# Altium PCB PCB Rev. 4.PcbDoc
Units mm, origin at the board's own origin, x right, y up, seen from the top; angles counter-clockwise.
Board outline 59 x 80 mm, 2 copper layers (Top Layer, Bottom Layer); 42 components, 70 nets, 272 pads, 157 vias.
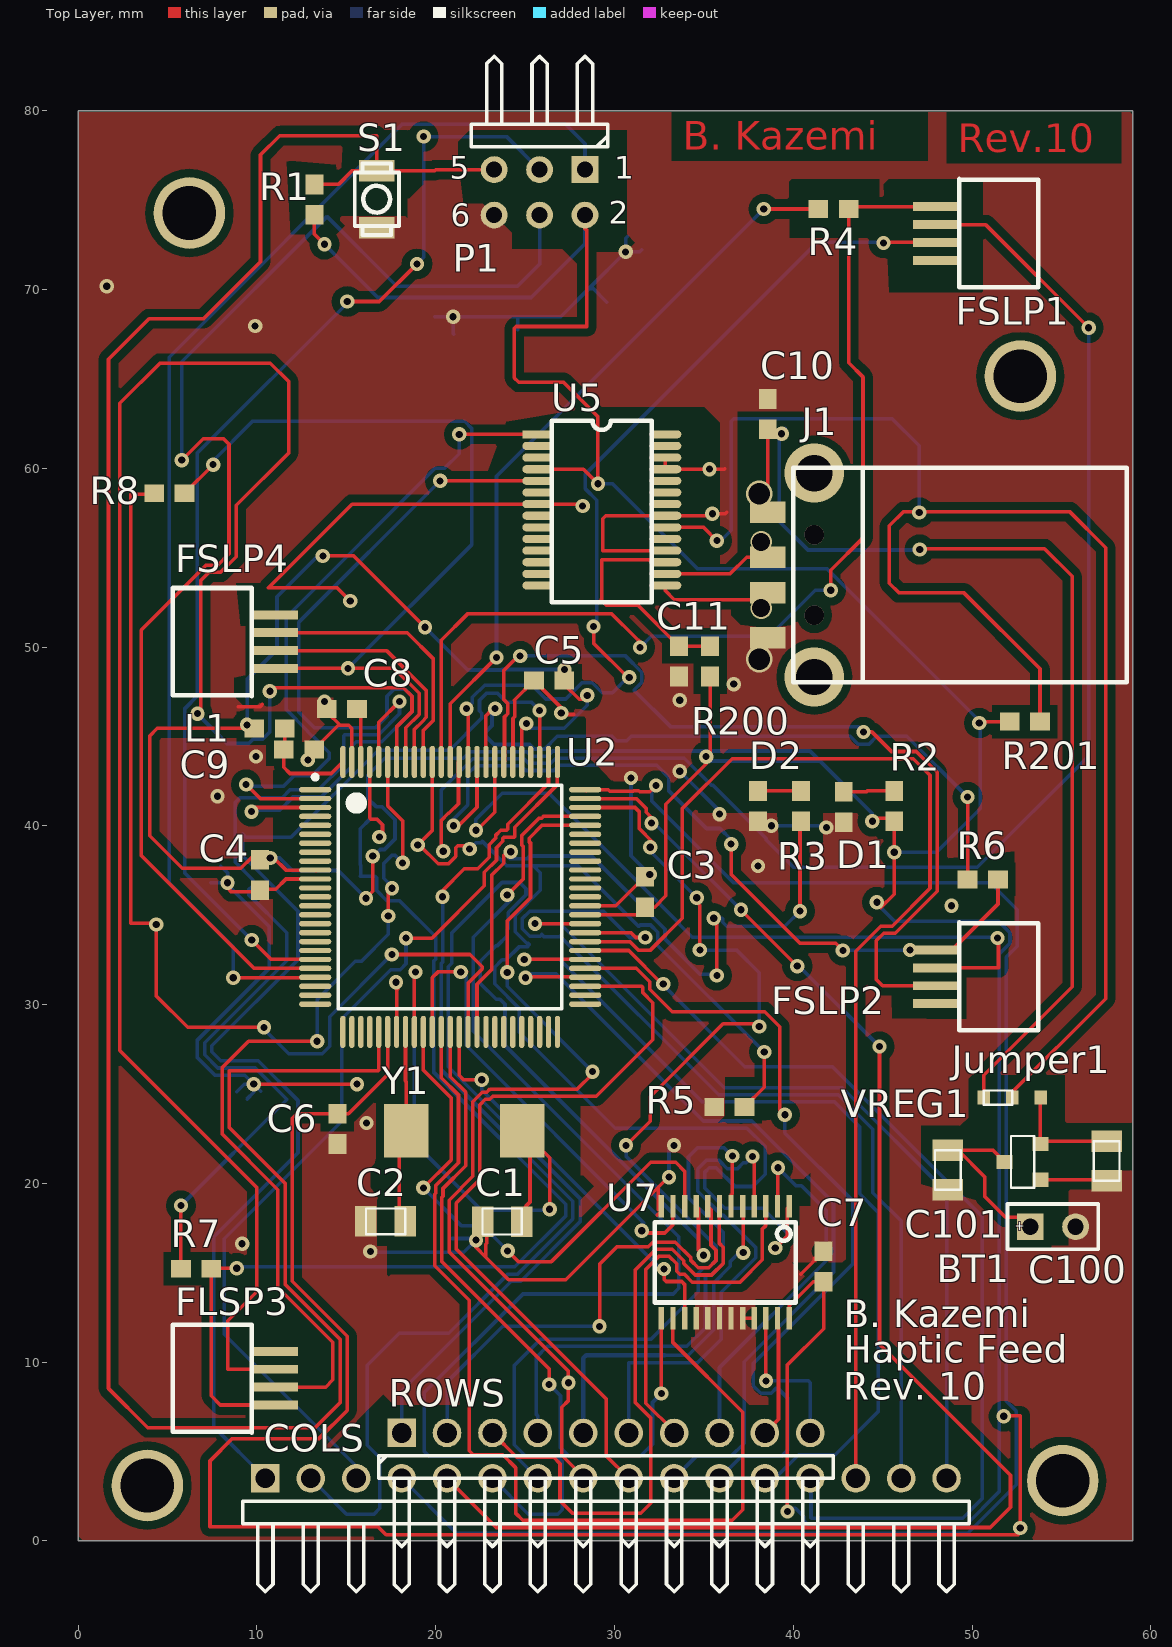
[diagram p0: Top Layer view]
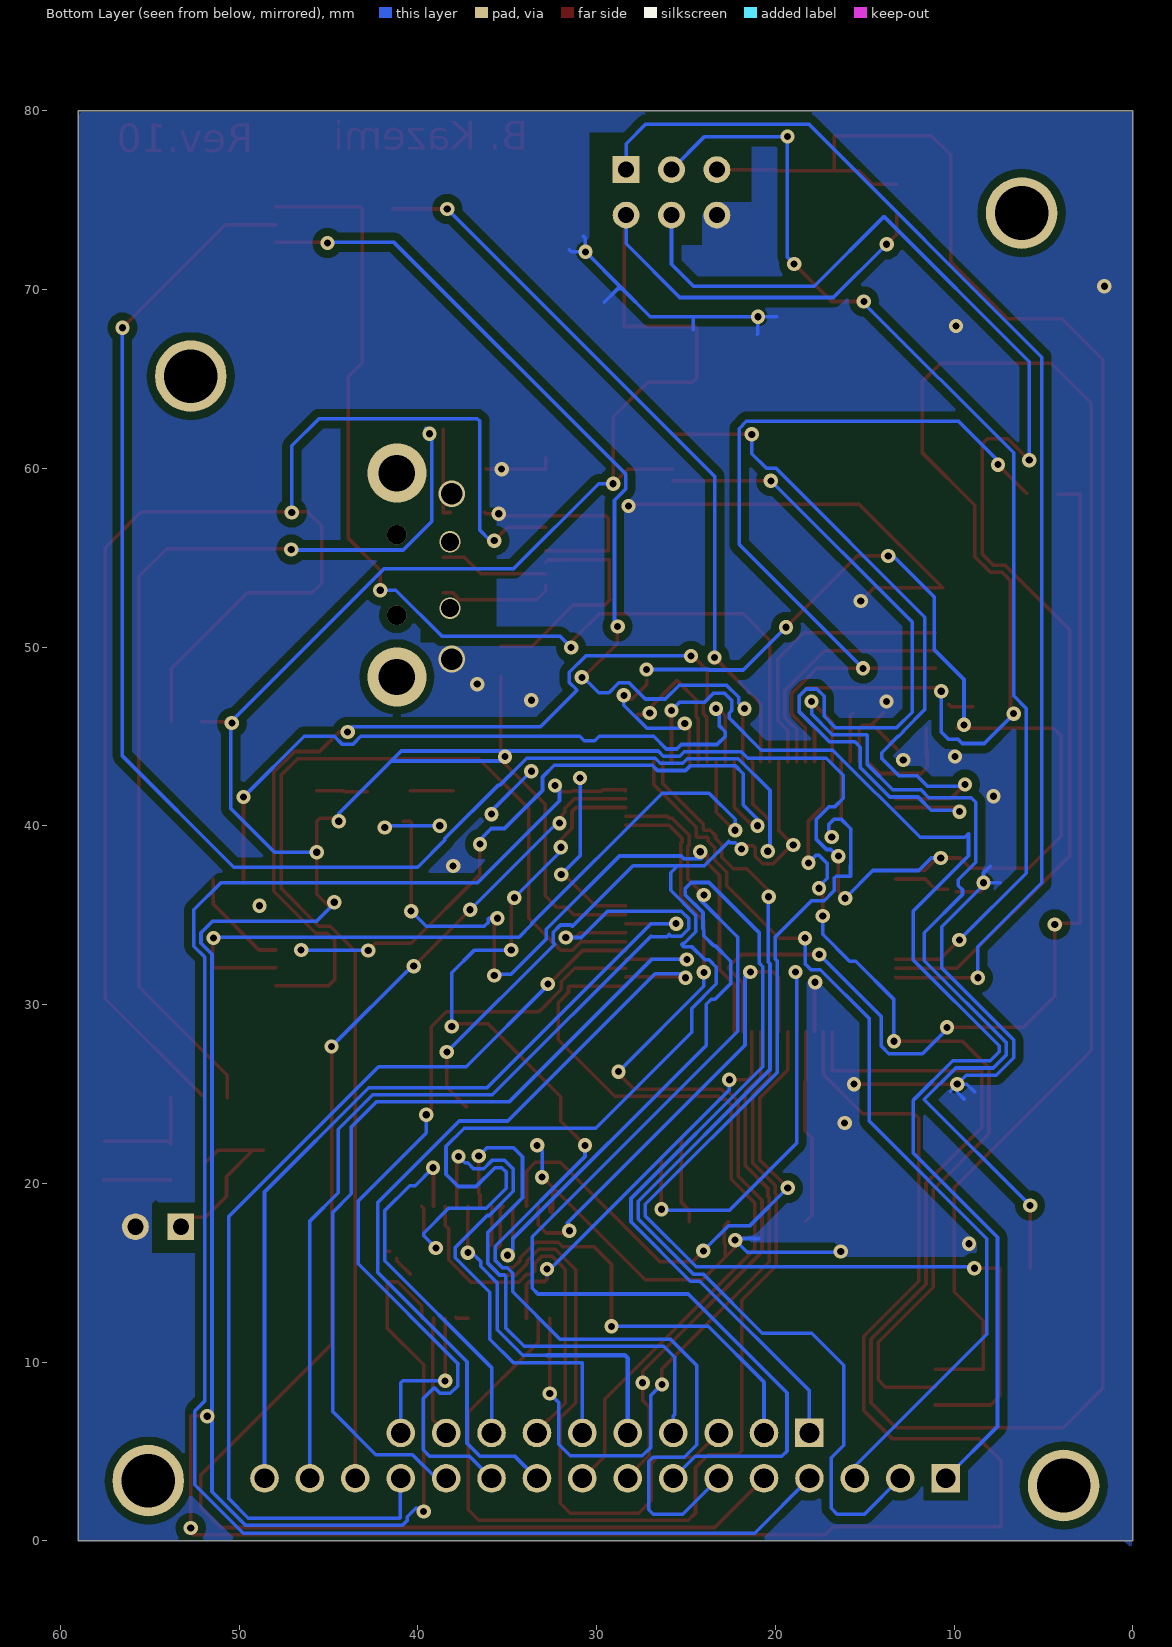
[diagram p1: Bottom Layer view, seen from below]

## Layer stack, top to bottom
Top Solder: solder mask 0.0102, Solder Resist, Dk 3.5
Top Layer: signal copper 0.0356
Dielectric1: core 0.32, FR-4, Dk 4.8
Bottom Layer: signal copper 0.0356
Bottom Solder: solder mask 0.0102, Solder Resist, Dk 3.5

## Board outline
0,80 59,80 59,0 0,0

## Design rules (kind name [scope] priority, off if disabled: settings)
Clearance Clearance_Pour [inPoly] p1: gap=0.45
Clearance [All] p2: gap=0.2
ComponentClearance [All] p1 off: gap=0.2 collisioncheckmode=3 verticalgap=0.2 showdistances=FALSE
FabricationTestPointUsage TestPointUsage [All] p1: valid=0 allowmultiple=FALSE
FabricationTestpoint Testpoint [All] p1: side=3 testpointundercomponent=TRUE minsize=1.016 maxsize=2.54 preferedsize=1.524 minholesize=0 maxholesize=1.016 preferedholesize=0.813 testpointgrid=0.025 allowsidetop=TRUE allowsidebottom=TRUE usegrid=TRUE gridtolerance=0
HoleSize [All] p1: absolutevalues=TRUE maxlimit=4 minlimit=0.2 maxpercent=80.000 minpercent=20.000
MinimumSolderMaskSliver [All] p1 off: minsoldermaskwidth=0.254
PasteMaskExpansion [All] p1 off: expansion=0
PlaneClearance [All] p1: clearance=2
PlaneConnect [All] p1: planeconnectstyle=Direct reliefexpansion=0.8 reliefentries=2 reliefconductorwidth=0.4 reliefairgap=0.4
PolygonConnect [All] p1: connectstyle=Direct reliefconductorwidth=1 reliefentries=4 polygonreliefangle="90 Angle" airgapwidth=0.254
RoutingVias [All] p1: holewidth=0.4 width=0.8 viastyle="Through Hole" minholewidth=0.4 minwidth=0.8 maxholewidth=4 maxwidth=4
SilkToSilkClearance [All] p1 off: silktosilkclearance=0.254
SilkToSolderMaskClearance SilkscreenOverComponentPads [IsPad] p1 off: minsilkscreentomaskgap=0.254 clearancetoexposedcopper=TRUE
SolderMaskExpansion [All] p1 off: expansion=0.102
UnpouredPolygon [All] p1: allowunpoured=FALSE
Width [All] p1: maxlimit=2.6 minlimit=0.2 preferedwidth=0.2 minimp=50.000000 maximp=50.000000 favimp=50.000000
19 further rules are at their usual default settings.

## Components (designator, comment, footprint, x,y, rotation, side; value= is the part's Value field where it differs from the comment)
BT1 "Battery 3.7V Li-Ion" BAT-2 54.525,17.575 r0 top
C1 "12 pF" 0805 23.72,17.863 r180 top
C2 "12 pF" 0805 17.2,17.875 r180 top
C3 "100 nF" 1608[0603] 31.7,36.3 r90 top
C4 "100 nF" 1608[0603] 10.175,37.25 r270 top
C5 "100 nF" 1608[0603] 26.35,48.125 r180 top
C6 "100 nF" 1608[0603] 14.5,23.05 r270 top
C7 "100 nF" 1608[0603] 41.7,15.35 r90 top
C8 "100 nF" 1608[0603] 14.75,46.525 r0 top
C9 "100 nF" 1608[0603] 12.35,44.275 r180 top
C10 "4.7 uF" 1608[0603] 38.575,63.025 r90 top
C11 "100 nF" 1608[0603] 33.6,49.2 r90 top
C100 "1 uF" 0805 57.525,21.25 r90 top
C101 "1 uF" 0805 48.65,20.75 r90 top
COLS "XYZ Pad Columns" "16 PIN HEAD" 10.475,3.5 r0 top (schematic designator COLS1)
D1 "Power LED" 1608[0603] 42.825,41.05 r270 top
D2 "Debug LED" 1608[0603] 38.025,41.1 r270 top
FLSP3 "FSLP" "FSLP SMT connector" 8.204,10.604 r270 top
FSLP1 "FSLP" "FSLP SMT connector" 50.796,71.628 r90 top
FSLP2 "FSLP" "FSLP SMT connector" 50.796,30.054 r90 top
FSLP4 "FSLP" "FSLP SMT connector" 8.204,51.8 r270 top
J1 "USB_CONN_A" USB_CONN_TYPEA_.9 43.875,54.025 r90 top
Jumper1 "0-Ohm Jumper 0603" 0603-Jumper 52.25,24.8 r90 top
L1 "10 uH" 1608[0603] 10.7,45.45 r180 top
P1 "ICSP" HDR2X3H 28.35,76.7 r180 top
R1 "10K" 1608[0603] 13.218,75.023 r270 top
R2 "750" 1608[0603] 45.65,41.1 r90 top
R3 "750" 1608[0603] 40.425,41.1 r90 top
R4 "4.64K" 1608[0603] 42.25,74.5 r0 top
R5 "20K" 1608[0603] 36.425,24.275 r0 top
R6 "4.64K" 1608[0603] 50.6,37 r0 top
R7 "4.64K" 1608[0603] 6.6,15.225 r0 top
R8 "4.64K" 1608[0603] 5.1,58.6 r0 top
R200 "'Bat Jump" J1-0603 35.35,49.2 r90 top
R201 "Bat Jump" J1-0603 52.95,45.825 r180 top
ROWS "XYZ Pad Rows" "10 PIN HEAD" 18.095,6.04 r0 top (schematic designator ROWS1)
S1 "Reset" B3U-1000P 16.697,75.048 r90 top
U2 "ATmega640" 100A_N 20.811,36.024 r0 top
U5 "FT232R" SSOP28 25.738,61.894 r0 top
U7 "74HC4067" 74HC4067 39.771,18.46 r180 top
VREG1 "mcp1700" SOT-23 52.825,21.2 r90 top
Y1 "XTAL" CRYSTAL 18.35,22.95 r0 top

## Footprints (in the part's own frame and the unit in brackets; to place one, negate y for a bottom-side part, rotate by r counter-clockwise, add the part's x,y. Pads: shape width x height; smd on the part's side, far side on the other; paste and mask are expansions set on the pad)
"10 PIN HEAD" [mm] "Connector; Header; 10 Position; Right Angle"
  rect 1.6x1.6 hole 1.1: 1(0,0)
  round 1.6 hole 1.1: 2(2.54,0) 3(5.08,0) 4(7.62,0) 5(10.16,0) 6(12.7,0) 7(15.24,0) 8(17.78,0) 9(20.32,0) 10(22.86,0)
  silkscreen extent -1.27,-6.35 24.13,-1.27
"16 PIN HEAD" [mm] "Connector; Header; 16 Position; Right Angle"
  rect 1.6x1.6 hole 1.1: 1(0,0)
  round 1.6 hole 1.1: 2(2.54,0) 3(5.08,0) 4(7.62,0) 5(10.16,0) 6(12.7,0) 7(15.24,0) 8(17.78,0) 9(20.32,0) 10(22.86,0) 11(25.4,0) 12(27.94,0) 13(30.48,0) 14(33.02,0) 15(35.56,0) 16(38.1,0)
  silkscreen extent -1.27,-6.35 39.37,-1.27
74HC4067 [mm]
  rect 0.3x1.25 smd: 1(0,-0.25) 2(0.65,-0.25) 3(1.3,-0.25) 4(1.95,-0.25) 5(2.6,-0.25) 6(3.25,-0.25) 7(3.9,-0.25) 8(4.55,-0.25) 9(5.2,-0.25) 10(5.85,-0.25) 11(6.5,-0.25) 12(7.15,-0.25) 13(7.15,6) 14(6.5,6) 15(5.85,6) 16(5.2,6) 17(4.55,6) 18(3.9,6) 19(3.25,6) 20(2.6,6) 21(1.95,6) 22(1.3,6) 23(0.65,6) 24(0,6)
  silkscreen extent -0.38,0.62 7.52,5.13
100A_N [mm] "Thin QFP, 100-Leads, Body 14x14mm, Pitch 0.5mm, IPC Medium Density"
  oval 1.8x0.3 smd: 1(-7.55,6) 2(-7.55,5.5) 3(-7.55,5) 4(-7.55,4.5) 5(-7.55,4) 6(-7.55,3.5) 7(-7.55,3) 8(-7.55,2.5) 9(-7.55,2) 10(-7.55,1.5) 11(-7.55,1) 12(-7.55,0.5) 13(-7.55,0) 14(-7.55,-0.5) 15(-7.55,-1) 16(-7.55,-1.5) 17(-7.55,-2) 18(-7.55,-2.5) 19(-7.55,-3) 20(-7.55,-3.5) 21(-7.55,-4) 22(-7.55,-4.5) 23(-7.55,-5) 24(-7.55,-5.5) 25(-7.55,-6) 51(7.55,-6) 52(7.55,-5.5) 53(7.55,-5) 54(7.55,-4.5) 55(7.55,-4) 56(7.55,-3.5) 57(7.55,-3) 58(7.55,-2.5) 59(7.55,-2) 60(7.55,-1.5) 61(7.55,-1) 62(7.55,-0.5) 63(7.55,0) 64(7.55,0.5) 65(7.55,1) 66(7.55,1.5) 67(7.55,2) 68(7.55,2.5) 69(7.55,3) 70(7.55,3.5) 71(7.55,4) 72(7.55,4.5) 73(7.55,5) 74(7.55,5.5) 75(7.55,6)
  oval 0.3x1.8 smd: 26(-6,-7.55) 27(-5.5,-7.55) 28(-5,-7.55) 29(-4.5,-7.55) 30(-4,-7.55) 31(-3.5,-7.55) 32(-3,-7.55) 33(-2.5,-7.55) 34(-2,-7.55) 35(-1.5,-7.55) 36(-1,-7.55) 37(-0.5,-7.55) 38(0,-7.55) 39(0.5,-7.55) 40(1,-7.55) 41(1.5,-7.55) 42(2,-7.55) 43(2.5,-7.55) 44(3,-7.55) 45(3.5,-7.55) 46(4,-7.55) 47(4.5,-7.55) 48(5,-7.55) 49(5.5,-7.55) 50(6,-7.55) 76(6,7.55) 77(5.5,7.55) 78(5,7.55) 79(4.5,7.55) 80(4,7.55) 81(3.5,7.55) 82(3,7.55) 83(2.5,7.55) 84(2,7.55) 85(1.5,7.55) 86(1,7.55) 87(0.5,7.55) 88(0,7.55) 89(-0.5,7.55) 90(-1,7.55) 91(-1.5,7.55) 92(-2,7.55) 93(-2.5,7.55) 94(-3,7.55) 95(-3.5,7.55) 96(-4,7.55) 97(-4.5,7.55) 98(-5,7.55) 99(-5.5,7.55) 100(-6,7.55)
  silkscreen extent -7.67,-6.25 6.25,6.82, body extent -7,-7 7,7, height 1.2
0603-Jumper [mm] "0603-Jumper"
  rect 0.8x0.7 smd: 1(0,1.6) 2(0,0) 3(0,-1.6)
  silkscreen extent -0.4,0 0.4,1.6, body extent -0.4,0 0.4,1.6, height 0.5
0805 [mm]
  rect 1.2x1.7 smd: 1(-1.1,0) 2(1.1,0)
  silkscreen extent -1.1,-0.73 1.1,0.72, body extent -1.1,-0.72 1.1,0.72, height 0.95
1608[0603] [mm] "Chip Capacitor; Body 1.6 x 0.8 mm (LxW typ)"
  rect 1.1x1 smd: 1(-0.85,0) 2(0.85,0)
B3U-1000P [mm] "Omron B3U-1000P"
  rect 1.2x2 smd: 1(-1.6,0) 2(1.6,0)
  silkscreen extent -2,-1.25 2,1.23, body extent -2,-1.25 2,1.22, height 1.2
BAT-2 [mm]
  rect 1.5x1.5 hole 0.9: 1(-1.27,0)
  round 1.5 hole 0.9: 2(1.27,0)
  silkscreen extent -2.54,-1.27 2.54,1.27
CRYSTAL [mm]
  rect 2.5x3 smd: 1(0,0) 2(6.5,0)
"FSLP SMT connector" [mm] "JST 4-pin SMT Connector"
  rect 0.5x2.5 smd: 1(3,2.85) 2(2,2.85) 3(1,2.85) 4(0,2.85)
  silkscreen extent -1.5,-2.9 4.55,1.5
HDR2X3H [mm] "Connector; Header; 3x2 Position; Right Angle"
  rect 1.5x1.5 hole 0.9: 1(0,0)
  round 1.5 hole 0.9: 2(0,2.54) 3(2.54,0) 4(2.54,2.54) 5(5.08,0) 6(5.08,2.54)
  silkscreen extent -1.27,-6.35 6.35,-1.27
J1-0603 [mm] "Chip Resistor; Body 1.6 x 0.8 mm (LxW typ)"
  rect 1.1x1 smd: 1(-0.85,0) 2(0.85,0)
SOT-23 [mm]
  rect 0.8x0.9 smd: 1(-1,-1) 2(1,-1) 3(0,1)
  silkscreen extent -1.45,-0.65 1.45,0.65, body extent -1.45,-0.65 1.45,0.65, height 1.1
SSOP28 [mil]
  rect 70x17.7 smd: 1(0,0)
  oval 70x17.7 smd: 2(0,-25.6) 3(0,-51.2) 4(0,-76.8) 5(0,-102.4) 6(0,-128) 7(0,-153.6) 8(0,-179.2) 9(0,-204.8) 10(0,-230.4) 11(0,-256) 12(0,-281.6) 13(0,-307.2) 14(0,-332.8) 15(280,-332.8) 16(280,-307.2) 17(280,-281.6) 18(280,-256) 19(280,-230.4) 20(280,-204.8) 21(280,-179.2) 22(280,-153.6) 23(280,-128) 24(280,-102.4) 25(280,-76.8) 26(280,-51.2) 27(280,-25.6) 28(280,0)
  silkscreen extent 30,-370 250,30
USB_CONN_TYPEA_.9 [mm]
  rect 1.199x1.999 smd: 1(3.5,5.298) 2(1,5.298) 3(-1,5.298) 4(-3.5,5.298)
  silkscreen extent -5.99,-14.78 5.99,3.89

## Part data
BT1: library part Battery, "Multicell Battery"
C1 C2 C3 C4 C5 C6 C7 C8 C9 C11 C100 C101: library part Cap, "Capacitor"
C10: library part CAP, "Capacitor"
COLS: library part "Header 16", "Header, 16-Pin"
D1: library part LED3, "Typical BLUE SiC LED"
D2: library part LED3, "Orange"
J1: "Connector USB Type A"
L1: library part Inductor, "AVCC filter"
P1: library part "Header 3X2H", "Header, 3-Pin, Dual row, Right Angle"
R1 R2 R3 R4 R5 R6 R7 R8 R200 R201: library part Res3, "Resistor"
ROWS: library part "Header 10", "Header, 10-Pin"
S1: library part SW-SPST, "Single-Pole, Single-Throw Switch"
U2: library part FSLP
U5: "FT232R - USB UART IC"
U7: library part MUX-74HC4067, "MUX-74HC4067"
Y1: "Crystal Oscillator"

## Free pads (board coordinates)
  round 4 hole 3: 0(3.875,3.1) 0(6.225,74.275) 0(52.7,65.15) 0(55.075,3.375)

## Via types
v1: diameter 0.8, hole 0.4, Top Layer to Bottom Layer, 149 vias
v2: diameter 1.2, hole 1, Top Layer to Bottom Layer, 2 vias
v3: diameter 1.5, hole 1.2, Top Layer to Bottom Layer, 2 vias
v4: diameter 1.1, hole 1.1, Top Layer to Bottom Layer, 2 vias
v5: diameter 3.302, hole 2.032, Top Layer to Bottom Layer, 2 vias

## Nets (pads, with @x,y where several pads share a name; then routed paths per layer and width w, separated by ;. In a path a pad name is that pad's centre, name@x,y a point inside that pad or via, vN(x,y) a via of type N, cw(c..) or ccw(c..) an arc to the next point about the centre after c; other vN are vias at no path point)
AREF: C8.2 U2.98 | length 2.8
  Top Layer w0.2: C8.2@15.65,46.325 15.811,46.164 U2.98
"AV GND": BT1.2 C1.2 C2.2 C3.2 C4.2 C5.2 C6.2 C7.2 C8.1 C9.1 C10.2 C11.1 C100.1 C101.1 D1.2 D2.2 J1.4 P1.6 R5.1 S1.1 U2.11 U2.32 U2.62 U2.81 U2.99 U5.7 U5.18 U5.21 U5.25 U5.26 U7.12 U7.16 U7.17 U7.18 U7.19 U7.20 U7.21 VREG1.1 | length 159.3
  Top Layer w0.2: v1(8.36,36.818) 8.36,36.515 8.575,36.3 C4.2@9.875,36.3 ; 8.966,46.66 10.174,46.66 10.296,46.783 ; v1(9.825,25.55) v1(15.6,25.55) ; C4.2@10.35,36.45 11.05,36.45 11.624,37.024 U2.11 ; C9.1 14.544,45.619 15.138,45.619 15.311,45.446 U2.99 ; C8.1@13.95,46.325 14.656,45.619 ; v1(15.225,52.575) 14.483,53.317 10.647,53.317 15.322,57.993 U5.7 28.113,57.993 v1(28.219,57.887) ; v1(17.775,31.25) 17.875,31.15 17.875,30.85 17.811,30.786 U2.32 ; v1@22.25,16.6 v1(22.25,16.825) 22.25,16.425 22.8,15.875 ; C1.2 22.857,17.626 22.857,16.657 22.8,16.6 22.8,15.875 ; U2.81 24.325,43.588 24.325,45.997 24.424,46.095 24.424,47.007 24.403,47.028 C5.2 v1@27.2,46.425 ; v1(27.026,46.304) 27.104,46.226 27.721,46.226 ; U2.62 30.074,35.524 C3.2 ; 32.383,18.208 32.621,18.446 U7.12 32.45,18.539 32.45,19.775 ; U5.18 29.343,55.392 29.337,55.397 29.337,57.175 29.504,57.342 U5.21 v1@35.231,57.342 ; U5.26 U5.25 v1@35.311,59.943 ; v1@33.05,20.25 v1(33.05,20.35) 33.025,20.35 32.45,19.775 ; v1(35.311,59.95) 36.15,59.95 36.17,59.969 ; v1(35.475,57.45) 36.19,57.45 36.271,57.531 ; U7.20 U7.21 ; U7.21@37.821,12.421 U7.21 ; U7.21@37.871,12.51 U7.21 ; 40.411,14.91 41.178,15.677 41.178,15.803 ; C7.2@41.575,16.2 C7.2 ; VREG1.1@53.875,20.15 VREG1.1 ; 54.975,20.2 VREG1.1 ; C100.1@57.575,20.2 C100.1 57.475,20.2 VREG1.1 ; 22.8,15.875 24.075,14.6 27.275,14.6 32.45,19.775
  Bottom Layer w0.2: 7.428,36.818 v1(8.36,36.818) ; 7.976,37.744 8.36,37.36 v1(8.36,36.818) ; v1@8.296,36.754 10.7,34.35 10.7,32.047 6.675,28.022 6.675,27.028 7.653,26.05 9.325,26.05 v1(9.825,25.55) ; v1@8.664,36.818 v1(8.36,36.818) ; 8.865,25.121 9.294,25.55 v1(9.825,25.55) ; 9.449,24.714 9.825,25.09 v1(9.825,25.55) ; 10.222,25.153 v1(9.825,25.55) ; v1@16.339,16.15 21.575,16.15 v1(22.25,16.825) 22.159,16.916 20.93,16.916 ; 19.939,68.478 20.972,68.478 v1(20.975,68.475) ; 21.006,67.488 20.975,67.519 v1(20.975,68.475) ; 24.587,67.742 24.587,68.475 ; 29.566,69.291 28.805,70.052 28.577,70.052 ; v1@30.625,72.125 v1(30.625,72.1) ; 30.734,72.974 30.625,72.865 v1(30.625,72.1) ; v1@30.925,42.7 30.925,38.325 v1(31.975,37.275) ; 31.521,72.212 31.409,72.1 v1(30.625,72.1) ; v1(33.05,20.35) 33.05,21.85 v1(33.325,22.125) ; v1(33.65,43.05) 35.875,40.825 v1(35.875,40.65) ; v1(38.775,40) 41.75,40 v1(41.85,39.9) ; v1(20.975,68.475) 24.587,68.475 ; 24.587,68.475 27,68.475 28.577,70.052 ; 28.577,70.052 v1(30.625,72.1)
  other v1: 16.346,16.186 9.175,16.625 16.125,23.375 38.025,37.75 7.8,41.65 30.927,42.677 12.85,43.675 9.95,43.875 13.786,46.95 33.65,47.025 36.675,47.925 9.9,67.95 1.6,70.175
  other v3: 38.1,49.325
AVCC#: C9.2 L1.1 U2.100 | length 6.3
  Top Layer w0.2: C9.2 11.5,43.275 11.85,42.925 14.162,42.925 U2.100 ; C9.2@11.55,43.85 L1.1
BATSEL: C100.2 Jumper1.3 VREG1.2 | length 6.4
  Top Layer w0.2: Jumper1.3 53.825,24.775 VREG1.2 53.975,22.35 C100.2
COLUMN#1: COLS.1 U2.78 | length 69.8
  Top Layer w0.2: U2.78 v1(25.811,46.45)
  Bottom Layer w0.2: COLS.1 7.576,6.399 7.576,16.981 12.3,21.705 12.3,24.631 10.08,26.85 7.984,26.85 7.475,27.359 7.475,27.691 12.3,32.516 12.3,35.228 9.2,38.328 9.2,39.55 9.4,39.35 11.903,39.35 16.784,44.231 20.784,44.231 22.582,46.029 22.582,46.303 22.45,46.435 22.45,47.015 22.86,47.425 23.44,47.425 23.85,47.015 23.945,46.92 25.341,46.92 v1(25.811,46.45)
COLUMN#2: COLS.2 U2.77 | length 59.8
  Top Layer w0.2: v1(20.378,36.028) 20.378,36.373 21.605,37.6 22.356,37.6 23,38.244 23,38.944 23.35,39.294 23.35,39.456 23.646,39.752 23.977,39.752 24.025,39.8 24.025,40.091 26.311,42.377 U2.77
  Bottom Layer w0.2: COLS.2 15.015,1.5 16.55,1.5 16.875,1.825 16.875,4.65 16.175,5.35 16.175,9.83 17.965,11.62 20.735,11.62 24.042,14.927 24.592,14.927 27.675,18.009 27.675,18.991 20.301,26.365 20.301,32.282 20.396,32.377 20.396,36.01 v1(20.378,36.028)
COLUMN#3: COLS.3 U2.76 | length 52.3
  Top Layer w0.2: v1(18.341,33.716) 19.791,33.716 22.725,36.65 22.725,37.404 23.4,38.079 23.4,38.779 23.75,39.129 23.75,39.291 23.811,39.352 24.389,39.352 24.425,39.388 24.425,39.925 26.811,42.311 U2.76
  Bottom Layer w0.2: COLS.3 15.555,4.17 8.172,11.553 8.172,16.901 14.739,23.469 14.739,29.204 17.485,31.95 18.01,31.95 18.341,32.281 v1(18.341,33.716)
COLUMN#4: COLS.4 U2.75 | length 97.5
  Top Layer w0.2: U2.75@28.411,41.974 U2.75 29.651,42.024 29.751,41.924 31.051,41.924 31.092,41.965 31.341,41.965 31.406,41.9 31.975,41.9 v1(32.325,42.25)
  Bottom Layer w0.2: COLS.4 21.161,0.434 49.765,0.434 52.475,3.144 52.475,7.265 51.912,7.827 51.912,32.657 52.525,33.269 52.525,35.3 51.01,36.815 36.657,36.815 32.075,41.397 v1@32.075,42.225
COLUMN#5: COLS.5 U2.74 | length 84.2
  Top Layer w0.2: COLS.5 23.385,0.75 51.025,0.75 52.15,1.875 52.15,3.675 44.825,11 v1(44.825,27.65) ; U2.74 31.217,41.524 31.775,40.966 31.775,40.757 32.075,40.457 v1@32.05,40.432 ; v1(37.075,35.3) 37.1,35.25 37.125,35.25 v1(40.225,32.15)
  Bottom Layer w0.2: v1(32.075,40.15) 32.225,40.15 33.6,38.775 v1(37.075,35.3) ; v1(40.225,32.15) 40.325,32.15 v1(44.825,27.65)
COLUMN#6: COLS.6 U2.73 | length 68.1
  Top Layer w0.2: U2.73 31.151,41.024 31.375,40.8 31.375,39.86 32.15,39.085 32.15,38.95 v1(32,38.8) ; v1(30.65,22.125) 32,23.475 32,24.85 36.075,28.925 v1@37.95,28.925 ; v1@34.4,35.925 34.775,35.55 v1(34.775,33.05)
  Bottom Layer w0.2: COLS.6 25.175,1.5 26.825,1.5 27.075,1.75 27.075,4.45 26.841,4.684 25.102,4.684 24.4,5.386 24.4,9.814 25.878,11.292 32.053,11.292 34.692,13.93 34.692,14.977 34.991,15.276 35.267,15.276 35.677,15.686 35.677,16.473 30.65,21.5 v1(30.65,22.125) ; v1(32,38.8) 32,38.575 v1(34.6,35.975) ; v1(34.775,33.05) 36.825,33.05 38.1,31.775 v1(38.1,28.775)
COLUMN#7: COLS.7 U2.72 | length 62.4
  Top Layer w0.2: v1(24.001,36.127) 24.007,36.127 24.901,37.021 24.901,38.842 24.825,38.918 24.825,39.469 25.78,40.424 25.924,40.424 26.024,40.524 U2.72
  Bottom Layer w0.2: v1(24.001,36.127) 24.001,36.124 24.216,35.909 24.216,35.878 22.101,33.763 22.101,28.506 32.391,18.216 33.601,17.006 33.601,14.133 33.28,13.811 24.882,13.811 19.35,8.279 19.35,5.025 19.64,4.735 24.48,4.735 COLS.7
COLUMN#8: COLS.8 U2.71 | length 51.4
  Top Layer w0.2: v1(24.001,31.802) 24.003,31.803 24.003,34.678 25.301,35.976 25.301,39.056 25.3,39.058 ; 25.251,39.058 25.225,39.084 25.225,39.303 25.946,40.024 U2.71 ; COLS.8 28.255,3.586 27.05,4.791 27.05,7.475 27.425,7.85 v1(27.425,8.85) 27.425,9.484 20.75,16.159 20.75,19.064 22.075,20.389 22.075,24.566 22.607,25.098 22.864,25.098 23.041,25.275 27.925,25.275 v1@28.75,26.1
  Bottom Layer w0.2: v1(24.001,31.802) 24.001,31.024 v1(28.775,26.25)
COLUMN#9: COLS.9 U2.53 | length 43
  Top Layer w0.2: U2.53 31.526,31.024 31.571,30.979 31.571,30.689 32.15,30.11 32.15,28.039 28.986,24.875 23.207,24.875 23.03,24.698 22.773,24.698 22.475,24.4 22.475,20.223 21.15,18.898 21.15,16.325 29.55,7.925 29.55,4.745 COLS.9
COLUMN#10: COLS.10 U2.54 | length 46.3
  Top Layer w0.2: v1(25.026,31.502) 25.09,31.566 28.319,31.566 U2.54
  Bottom Layer w0.2: v1(25.026,31.502) 25.25,31.725 26.73,31.725 34.967,23.488 37.685,23.488 42.25,18.923 42.25,15.031 37.25,10.031 37.25,5.467 36.508,4.725 34.56,4.725 COLS.10
COLUMN#11: COLS.11 U2.55 | length 46.4
  Top Layer w0.2: U2.55 31.226,32.024 31.971,31.279 31.971,30.854 33.224,29.601 38.412,29.601 39.25,28.763 39.25,24.115 v1(39.529,23.836)
  Bottom Layer w0.2: COLS.11 37.1,4.725 39.325,4.725 39.701,5.101 39.701,7.967 39.117,8.551 39.061,8.551 38.761,8.251 38.181,8.251 37.771,8.661 37.771,9.897 37.751,9.916 43.339,15.504 43.339,19.01 39.529,22.82 v1(39.529,23.836)
COLUMN#12: COLS.12 U2.56 | length 50.3
  Top Layer w0.2: v1(24.95,32.524) U2.56
  Bottom Layer w0.2: v1(24.95,32.524) 26.931,32.524 34.901,24.554 42.32,24.554 43.72,23.153 43.72,19.412 44.762,18.37 44.762,7.237 42.35,4.825 40.3,4.825 38.975,3.5 COLS.12
COLUMN#13: COLS.13 U2.57 | length 56.5
  Top Layer w0.2: U2.57 30.792,33.024 32.671,31.144 32.679,31.152 v1(32.727,31.152)
  Bottom Layer w0.2: v1(32.727,31.152) 32.721,31.146 32.721,31.095 37.288,26.528 42.196,26.528 50.575,18.149 50.575,2.375 49.475,1.275 41.025,1.275 40.993,1.307 40.993,3.462 COLS.13
COLUMN#14: COLS.14 U2.58 | length 69.3
  Top Layer w0.2: U2.58 30.858,33.524 31.331,33.05 32.015,33.05 33.8,34.835 33.8,40.971 36.584,43.754 46.721,43.754 47.65,42.825 47.65,36.503 45.534,34.388 44.893,34.388 43.495,32.99 COLS.14
COLUMN#15: COLS.15 U2.59 | length 56.2
  Top Layer w0.2: U2.59 30.923,34.024 31.197,33.75 v1(31.725,33.75)
  Bottom Layer w0.2: 26.089,35.225 25.26,35.225 24.85,34.815 24.85,34.235 25.26,33.825 25.84,33.825 25.938,33.923 26.06,33.8 26.915,33.8 26.944,33.829 26.956,33.829 35.832,24.954 42.519,24.954 44.454,23.018 44.454,19.479 46.035,17.899 COLS.15 ; 26.089,35.229 29.381,35.229 30.86,33.75 v1(31.725,33.75)
COLUMN#16: COLS.16 U2.60 | length 48.1
  Top Layer w0.2: v1(25.55,34.525) U2.60 U2.60
  Bottom Layer w0.2: v1(25.55,34.525) 26.96,34.525 36.132,25.354 42.74,25.354 48.575,19.519 COLS.16
"DEBUG LED": R3.1 U2.41 | length 40.3
  Top Layer w0.2: U2.41 22.311,31.136 23.125,31.95 23.125,37.238 23.8,37.913 23.8,38.35 24.101,38.651 v1(24.201,38.552) ; v1(35.55,34.825) 35.725,34.65 v1(35.725,31.625) ; v1(40.375,35.225) R3.1@40.375,40.2 ; R3.1 R3.1@40.825,40.25
  Bottom Layer w0.2: v1(24.201,38.552) 24.176,38.577 24.126,38.577 24.101,38.552 24.101,38.204 24.139,38.166 25.134,38.166 25.28,38.312 28.719,38.312 32.825,34.206 32.825,33.664 34.805,31.684 v1@35.618,31.684 ; v1(35.55,34.825) 36.025,34.825 36.05,34.8 36.05,34.6 36.275,34.375 39.525,34.375 v1(40.375,35.225)
E\N\: U2.39 U7.15 | length 23.1
  Top Layer w0.2: U2.39 21.311,26.039 21.552,25.798 v1(22.574,25.798) ; v1(32.775,15.211) 32.775,14.637 32.901,14.511 33.754,14.511 33.921,14.345 U7.15
  Bottom Layer w0.2: v1(22.574,25.798) 22.574,25.223 32.775,15.022 32.775,14.852 v1(32.775,15.211)
"FSLP RES #1": R4.1 U2.88 | length 41.2
  Top Layer w0.2: U2.88 20.811,46.824 v1(23.4,49.413) ; v1(38.352,74.5) R4.1
  Bottom Layer w0.2: v1(23.4,49.413) 23.4,59.548 v1(38.352,74.5)
"FSLP RES #2": R6.1 U2.84 | length 39.8
  Top Layer w0.2: U2.84 22.811,46.161 23.15,46.5 23.15,46.725 v1(23.324,46.551) ; R6.1 v1(49.75,41.606)
  Bottom Layer w0.2: v1(23.324,46.551) 23.15,46.725 23.15,45.606 22.811,45.267 22.811,44.999 23.263,44.547 25.268,44.547 25.521,44.294 26.101,44.294 26.807,45 29.86,45 30.11,44.75 30.69,44.75 30.94,45 43.185,45 43.635,44.55 44.215,44.55 44.665,45 46.356,45 v1(49.75,41.606)
"FSLP RES #3": R7.1 U2.96 | length 51.7
  Top Layer w0.2: R7.1 v1(5.75,18.758) ; U2.96 16.811,45.786 v1(17.975,46.95)
  Bottom Layer w0.2: v1(5.75,18.758) 11.666,24.674 11.666,24.699 9.915,26.45 7.818,26.45 7.075,27.194 7.075,27.856 11.666,32.447 11.666,34.021 9.534,36.153 9.534,36.418 9.768,36.652 9.768,36.984 8.8,37.952 8.8,41.325 9.05,41.575 11.419,41.575 11.852,42.009 13.431,42.009 14.85,43.428 14.85,45.043 14.902,45.095 16.811,45.095 17.975,46.259 v1(17.975,46.95)
"FSLP RES #4": R8.1 U2.40 | length 57.7
  Top Layer w0.2: R8.1@4.2,58.55 2.95,58.55 2.95,34.555 4.3,34.555 v1(4.372,34.483) 4.372,30.478 6.125,28.725 v1(10.4,28.725) ; v1(17.55,32.8) 21.883,32.8 ; U2.40 21.811,31.202 22.602,31.993 22.602,32.113 21.899,32.816
  Bottom Layer w0.2: v1@10.401,28.624 11.775,27.25 13.657,27.25 14.067,27.66 14.067,29.317 v1(17.55,32.8)
MISO: P1.1 U2.22 | length 71.3
  Top Layer w0.2: v1(8.675,31.5) 13.237,31.5 U2.22
  Bottom Layer w0.2: v1(8.675,31.5) 8.675,33.235 5.098,36.812 5.098,66.214 18.134,79.25 27.25,79.25 28.35,78.15 P1.1
MOSI: P1.4 U2.21 | length 74.8
  Top Layer w0.2: v1(5.798,60.451) 6.992,61.645 8.133,61.645 8.44,61.339 8.44,55.212 7.803,54.575 7.153,54.575 3.525,50.947 3.525,38.336 9.837,32.024 U2.21
  Bottom Layer w0.2: v1(5.798,60.451) 5.798,65.949 13.925,74.075 17.825,70.175 24.575,70.175 25.81,71.41 P1.4
NetBT1_1: BT1.1 C101.2 VREG1.3 | length 10.1
  Top Layer w0.2: C101.2 C101.2@49.225,21.85 ; VREG1.3 51.175,21.85 C101.2@49.225,21.85 ; BT1.1@53.721,18.1 51.875,18.1 50.7,19.275 50.7,20.375 C101.2@49.225,21.85
NetC1_1: C1.1 U2.34 Y1.2 | length 32.6
  Top Layer w0.2: U2.34 18.811,31.761 v1(18.875,31.825) ; C1.1 24.82,18.502 25.275,18.957 25.275,22.525 Y1.2 26.375,21.425 v1(26.375,18.55)
  Bottom Layer w0.2: v1(18.875,31.825) 18.811,31.761 18.811,22.253 22.562,18.502 v1@26.375,18.502
NetC2_1: C2.1 U2.33 Y1.1 | length 10.9
  Top Layer w0.2: C2.1 17.95,18.225 17.95,22.55 Y1.1 18.35,25.69 18.311,25.729 U2.33
NetD1_1: D1.1 R2.2 | length 2.8
  Top Layer w0.2: D1.1 44.102,41.9 44.152,41.95 R2.2
NetD2_1: D2.1 R3.2 | length 2.4
  Top Layer w0.2: D2.1 39.225,41.95 R3.2
NetJ1_2: J1.2 U5.16 | length 6.1
  Top Layer w0.2: U5.16 36.466,54.091 37.4,55.025 ; 37.447,55.025 J1.2
  other v2: 38.2,55.875
NetJ1_3: J1.3 U5.15 | length 6.4
  Top Layer w0.2: U5.15 32.85,53.147 33.347,52.65 37.65,52.65 38.025,53.025 J1.3
  other v2: 38.2,52.175
R\E\S\E\T\: P1.5 R1.1 S1.2 U2.30 | length 139.7
  Top Layer w0.2: R1.1 14.561,75.873 15.337,76.648 S1.2 ; U2.30 16.811,26.336 16.775,26.3 8.45,26.3 8.45,23.125 11.575,20 11.575,14.359 14.65,11.284 14.65,7.725 13.25,6.325 3.903,6.325 1.7,8.528 1.7,66.092 3.969,68.362 7.012,68.362 10.2,71.55 10.2,77.525 11.278,78.603 16.697,78.603 S1.2 ; P1.5 19.998,76.7 19.946,76.648 S1.2
ROW#1: ROWS.1 U7.9 | length 70.8
  Top Layer w0.2: U7.9 34.7,18.581 34.7,16.252 v1(34.977,15.976)
  Bottom Layer w0.2: ROWS.1 18.095,8.395 24.227,14.527 24.758,14.527 28.075,17.844 28.075,19.156 20.701,26.53 20.701,32.117 20.892,32.307 20.892,34.008 23.711,36.827 24.709,36.827 25.051,36.485 25.051,36.148 24.05,35.146 24.05,34.235 24.009,34.194 24.009,33.852 23.458,33.302 23.38,33.302 22.501,32.423 22.501,31.18 23.381,30.3 23.594,30.3 23.875,30.019 23.875,27.709 34.7,16.884 34.7,16.252 v1(34.977,15.976)
ROW#2: ROWS.2 U7.8 | length 27.2
  Top Layer w0.2: v1(29.166,11.999) 29.166,15.479 30.143,16.455 31.898,16.455 32.154,16.711 33.396,16.711 34.277,15.831 34.277,15.686 34.688,15.275 35.266,15.275 35.677,15.686 35.677,16.266 35.4,16.542 35.4,18.531 U7.8
  Bottom Layer w0.2: ROWS.2 20.635,8.885 23.749,11.999 v1(29.166,11.999)
ROW#3: ROWS.3 U7.7 | length 35.2
  Top Layer w0.2: ROWS.3 24.54,4.675 26.6,4.675 26.952,4.323 26.952,2.248 27.65,1.55 31.475,1.55 32.025,2.1 32.025,6.875 31.173,7.727 31.173,15.165 32.319,16.311 33.231,16.311 33.875,15.667 33.875,15.522 34.522,14.875 35.432,14.875 36.077,15.52 36.077,16.431 35.871,16.637 U7.7
ROW#4: ROWS.4 U7.6 | length 31
  Top Layer w0.2: U7.6 36.521,19.351 36.595,19.425 v1(36.595,21.525)
  Bottom Layer w0.2: ROWS.4 25.715,6.992 25.636,7.072 25.636,10.272 26.245,10.882 34.043,10.882 35.092,11.931 35.092,14.811 35.156,14.876 35.432,14.876 36.077,15.52 36.077,17.264 34.143,19.198 34.143,21.497 34.627,21.981 36.138,21.981 v1(36.595,21.525)
ROW#5: ROWS.5 U7.5 | length 20.1
  Top Layer w0.2: U7.5 37.2,18.681 v1(37.2,16.125)
  Bottom Layer w0.2: 32.603,10.388 32.8,10.388 34.121,10.388 35.55,11.816 35.55,14.427 36.477,15.354 36.477,15.63 36.985,16.139 37.186,16.139 v1(37.2,16.125)
  Bottom Layer w0.254: ROWS.5 28.255,10.23 28.413,10.388 32.8,10.388
ROW#6: ROWS.6 U7.4 | length 27.9
  Top Layer w0.2: v1(37.725,21.5) 37.821,21.404 U7.4
  Bottom Layer w0.2: ROWS.6 30.795,9.961 34.647,9.961 35.973,11.288 35.973,13.908 37.49,15.425 37.9,15.835 37.9,16.415 36.113,18.202 36.011,18.202 34.659,19.554 34.659,20.801 35.139,21.281 35.848,21.281 36.305,20.825 36.885,20.825 37.209,21.15 37.375,21.15 v1(37.725,21.5)
ROW#7: ROWS.7 U7.3 | length 21
  Top Layer w0.2: ROWS.7 33.335,6.131 31.757,7.709 31.757,15.183 32.485,15.911 33.065,15.911 33.475,15.501 33.475,15.079 33.643,14.911 33.92,14.911 34.356,14.475 37.025,14.475 38.271,15.721 38.271,17.445 38.471,17.646 U7.3
ROW#8: ROWS.8 U7.2 | length 20.8
  Top Layer w0.2: U7.2 39.121,20.846 v1(39.15,20.875)
  Bottom Layer w0.2: ROWS.8 35.875,9.697 41.85,15.672 41.85,18.48 40.457,19.873 40.152,19.873 v1(39.15,20.875)
ROW#9: ROWS.9 U7.23 | length 6.8
  Top Layer w0.2: ROWS.9 39.174,6.799 39.174,11.921 39.121,11.974 U7.23
ROW#10: ROWS.10 U7.22 | length 8.8
  Top Layer w0.2: v1(38.471,8.951) U7.22
  Bottom Layer w0.2: v1(38.471,8.951) 40.849,8.951 40.955,8.845 ROWS.10
ROWDATA: R5.2 U2.90 U7.1 | length 81
  Top Layer w0.2: U2.90 19.811,39.736 v1(19,38.925) 19.085,38.925 20.135,37.875 20.715,37.875 21.125,38.285 21.125,38.772 21.238,38.885 21.867,38.885 21.9,38.852 v1(21.9,38.7) ; R5.2 38.375,25.375 v1(38.375,27.351) ; v1(38.989,16.383) 39.675,17.069 39.675,18.614 U7.1
  Bottom Layer w0.2: v1(21.9,38.7) 22.25,39.05 22.54,39.05 22.615,39.125 23.973,37.766 ; v1(38.375,27.351) 32.345,33.38 32.425,33.46 32.425,34.04 32.015,34.45 31.435,34.45 31.355,34.37 27.96,37.766 23.973,37.766 ; v1(38.989,16.383) 39.675,17.069 39.675,17.212 38.285,18.602 36.177,18.602 35.059,19.719 35.059,20.635 35.305,20.881 35.683,20.881 36.742,19.822 37.743,19.822 38.425,20.504 38.425,22.073 37.41,23.088 30.041,23.088 24.675,28.454 24.675,29.784 23.301,31.158 23.301,32.092 23.711,32.502 23.938,32.502 24.66,33.224 25.109,33.224 25.226,33.341 25.226,33.383 25.184,33.425 25.094,33.425 24.45,34.069 24.45,34.981 25.856,36.387 25.856,37.382 25.483,37.755 23.985,37.755 23.973,37.766
RX0: U2.2 U5.1 | length 37.7
  Top Layer w0.2: v1@9.42,42.261 9.396,42.285 v1(9.396,42.306) ; v1@9.421,42.261 9.388,42.294 9.388,42.303 9.391,42.306 v1(9.396,42.306) ; U2.2 10.179,41.524 9.425,42.277 v1(9.396,42.306) ; v1(21.318,61.894) U5.1
  Bottom Layer w0.2: v1@9.42,42.261 9.396,42.285 v1(9.396,42.306) ; v1@9.421,42.261 9.388,42.294 9.388,42.303 9.391,42.306 v1(9.396,42.306) ; v1(21.318,61.894) 21.318,60.815 20.496,59.993 19.961,59.993 11.64,51.672 11.64,46.5 12.846,45.295 12.846,45.251 13.098,44.999 13.141,44.999 14.05,44.091 14.05,43.759 13.099,42.809 12.087,42.809 11.478,42.2 9.503,42.2 9.425,42.277 v1(9.396,42.306)
S0: U2.35 U7.10 | length 30.8
  Top Layer w0.2: v1(19.311,19.746) 20.875,21.31 20.875,24.775 19.311,26.339 U2.35 ; v1@23.832,16.419 24.626,15.625 26.475,15.625 32.025,21.175 33.425,21.175 33.921,20.679 U7.10
  Bottom Layer w0.2: v1(19.311,19.746) 21.419,17.638 22.613,17.638 v1@23.832,16.419
  other v1: 24.026,16.225
S1: U2.36 U7.11 | length 26.9
  Top Layer w0.2: U2.36 19.811,31.511 20.125,31.825 21.743,31.825 21.743,31.827 v1(21.401,31.827) ; v1@31.634,17.221 32.814,17.221 33.271,17.678 U7.11
  Bottom Layer w0.2: v1(21.401,31.827) 21.451,31.827 21.701,31.576 21.701,27.718 31.634,17.785 ; v1(31.525,17.35) v1@31.525,17.675
S2: U2.37 U7.14 | length 56.2
  Top Layer w0.2: U2.37 20.311,25.905 21.275,24.941 21.275,21.145 20.011,19.881 20.011,19.456 19.95,19.395 19.95,15.386 21.875,13.461 21.875,5.05 22.1,4.825 23.747,4.825 24.467,4.105 24.467,1.558 24.875,1.15 36.589,1.15 37.175,1.736 37.175,7.191 33.271,11.095 U7.14
S3: U2.38 U7.13 | length 39.8
  Top Layer w0.2: U2.38 20.811,25.97 21.675,25.106 21.675,20.979 20.411,19.715 20.411,19.291 20.35,19.23 20.35,15.612 26.347,9.615 v1(26.347,8.748) ; v1(32.621,8.241) U7.13
  Bottom Layer w0.2: v1(26.347,8.748) 26.982,8.113 26.982,5.217 27.439,4.76 31.478,4.76 32.125,5.408 32.125,7.745 v1(32.621,8.241)
SCK: P1.3 U2.20 | length 64.1
  Top Layer w0.2: v1(9.71,33.615) 10.8,32.524 U2.20 ; v1(15.05,69.325) 16.85,69.325 v1(18.95,71.425)
  Bottom Layer w0.2: v1(9.71,33.615) 5.975,37.349 5.975,46.565 6.675,47.265 6.675,60.857 v1@14.968,69.15 ; v1(18.95,71.425) 19.325,71.8 v1(19.325,78.55) 23.96,78.55 P1.3
"TERMINAL1 #1": FSLP1.1 R4.2 U2.89 | length 58.8
  Top Layer w0.2: U2.89 20.311,50.386 21.775,51.85 29.85,51.85 31.162,50.538 31.425,50.275 v1(31.425,49.975) ; v1(42.1,53.175) 42.1,54.3 43.9,56.1 43.9,65.1 43.1,65.9 R4.2 43.228,74.628 FSLP1.1
  Bottom Layer w0.2: v1(31.425,49.975) 31.425,49.977 32.048,50.6 38.65,50.6 41.225,53.175 v1(42.1,53.175)
"TERMINAL1 #2": FSLP2.1 R6.2 U2.85 | length 44
  Top Layer w0.2: v1(21,40) 21.28,40 22.311,41.031 U2.85 ; v1(36.525,38.975) 36.525,37.275 40.375,33.425 42.375,33.425 v1(42.775,33.025) ; FSLP2.1 48.879,33.054 51.45,35.625 R6.2
  Bottom Layer w0.2: 21.05,40.425 21.204,40.579 21.792,41.167 21.792,42.906 22.234,43.347 24.771,43.347 25.024,43.094 26.598,43.094 26.887,43.382 32.368,43.382 33.025,42.725 33.025,41.975 35.15,39.85 35.9,39.85 36.525,39.225 v1(36.525,38.975) ; v1(42.775,33.025) 42.8,33.05 v1(46.525,33.05)
"TERMINAL1 #3": FLSP3.1 R7.2 U2.97 | length 66.6
  Top Layer w0.2: v1(8.872,15.25) 7.45,15.25 R7.2 7.45,8.111 7.957,7.604 FLSP3.1 ; U2.97 16.311,40.439 16.375,40.375 16.7,40.375 17.025,40.05 17.025,39.475 16.925,39.375 v1(16.85,39.375)
  Bottom Layer w0.2: v1(8.872,15.25) 8.948,15.327 24.427,15.327 27.275,18.175 27.275,18.825 19.901,26.199 19.901,32.448 19.996,32.542 19.996,33.792 17.978,35.81 17.268,35.81 16.701,36.377 16.701,37.087 16.602,37.186 15.776,37.186 15.8,37.21 15.8,37.79 15.776,37.814 15.776,39.826 16.325,40.375 16.7,40.375 17.025,40.05 17.025,39.475 16.925,39.375 v1(16.85,39.375)
"TERMINAL1 #4": FSLP4.1 R8.2 U2.93 | length 47.1
  Top Layer w0.2: R8.2 v1(7.55,60.2) ; FSLP4.1 v1@15.091,48.8 ; v1(15.095,48.804) v1@15.091,48.8 ; U2.93 18.325,43.588 18.325,45.478 19.075,46.228 19.075,47.406 17.681,48.8 v1@15.091,48.8
  Bottom Layer w0.2: v1(7.55,60.2) 7.55,60.418 9.753,62.621 21.622,62.621 22.029,62.215 22.029,55.738 v1(15.095,48.804)
"TERMINAL2 #1": FSLP1.2 U2.87 | length 86.2
  Top Layer w0.2: v1(20.425,38.575) 20.3,38.7 20.3,40.29 20.71,40.7 20.736,40.7 21.276,41.24 21.276,43.539 U2.87 ; FSLP1.2 50.748,73.628 v1(56.522,67.854)
  Bottom Layer w0.2: v1(20.425,38.575) 20.3,38.7 20.3,41.979 22.068,43.747 24.936,43.747 25.19,43.494 26.432,43.494 26.721,43.782 33.908,43.782 35.434,42.256 35.519,42.256 38.486,39.289 38.486,39.205 40.012,37.679 50.299,37.679 56.522,43.902 v1(56.522,67.854)
"TERMINAL2 #2": FSLP2.2 U2.83 | length 43.3
  Top Layer w0.2: v1(22.25,39.75) 22.3,39.75 23.311,40.761 U2.83 ; FSLP2.2 51.479,32.054 51.479,33.671 v1(51.425,33.725)
  Bottom Layer w0.2: v1(22.25,39.75) 22.25,40.361 23.717,41.828 26.334,41.828 33.625,34.537 33.625,34.484 34.342,33.767 51.383,33.767 v1(51.425,33.725)
"TERMINAL2 #3": FLSP3.2 U2.95 | length 48.8
  Top Layer w0.2: FLSP3.2 13.846,8.604 14.25,9.008 14.25,11.119 11.175,14.194 11.175,19.65 8.05,22.775 8.05,26.466 9.535,27.95 v1(13.367,27.95) ; U2.95 17.311,41.109 18.15,40.27 v1(18.15,37.925) ; v1(17.35,34.95) 17.346,34.954 17.346,36.298 v1(17.558,36.51)
  Bottom Layer w0.2: v1(13.367,27.95) 13.367,30.287 15.505,32.425 15.85,32.425 17.35,33.925 v1(17.35,34.95) ; v1(17.558,36.51) 17.558,36.607 17.101,37.064 17.101,37.893 17.57,38.361 17.714,38.361 v1(18.15,37.925)
"TERMINAL2 #4": FSLP4.2 U2.92 | length 13.6
  Top Layer w0.2: FSLP4.2 17.246,49.8 19.475,47.571 19.475,46.062 19.241,45.828 18.811,45.398 U2.92
"TERMINAL3 #1": FSLP1.3 U2.86 | length 51.6
  Top Layer w0.2: v1(21.726,46.552) 21.817,46.462 21.817,43.58 U2.86 ; v1(28.825,51.15) 28.851,51.123 28.851,50.187 30.738,48.3 v1(30.825,48.3) ; v1@45.078,72.628 FSLP1.3
  Bottom Layer w0.2: v1(21.726,46.552) 21.744,46.552 22.05,46.858 22.05,47.181 22.736,47.866 25.384,47.866 26.159,47.092 27.28,47.092 28.183,47.995 28.763,47.995 29.31,47.448 29.886,47.448 30.738,48.3 v1(30.825,48.3) ; v1(28.825,51.15) 29,51.325 29,58.216 28.376,58.841 28.376,59.672 41.333,72.629 v1@45.05,72.629
  other v1: 45.05,72.6
"TERMINAL3 #2": FSLP2.3 U2.82 | length 50.6
  Top Layer w0.2: U2.82 23.85,43.613 23.85,46.087 24.024,46.261 24.024,46.841 23.85,47.015 23.811,47.054 23.811,48.686 24.625,49.5 v1(24.725,49.5) ; v1(43.925,45.25) 44.4,45.25 45.496,44.154 46.886,44.154 48.05,42.991 48.05,36.338 45.7,33.988 45.059,33.988 44.65,33.579 44.65,31.4 44.996,31.054 FSLP2.3
  Bottom Layer w0.2: v1(24.725,49.5) 30.615,49.5 31.525,48.59 31.525,48.01 31.115,47.6 31.115,47.566 33.131,45.55 43.625,45.55 v1(43.925,45.25)
"TERMINAL3 #3": FLSP3.3 U2.94 | length 111.8
  Top Layer w0.2: v1(6.675,46.275) 6.7,46.25 6.825,46.25 6.85,46.275 6.85,53.706 7.319,54.175 7.969,54.175 8.85,55.056 8.85,57.925 11.775,60.85 11.775,64.85 10.75,65.875 4.575,65.875 2.325,63.625 2.325,27.436 9.989,19.772 9.989,13.93 8.375,12.315 8.375,9.604 FLSP3.3 ; v1@10.9,47.725 18.19,47.725 18.675,47.24 18.675,46.394 17.811,45.53 U2.94
  Bottom Layer w0.2: v1(6.675,46.275) 6.675,46.25 8.324,44.601 9.55,44.601 9.784,44.836 10.317,44.836 10.725,45.244 v1(10.725,47.525)
"TERMINAL3 #4": FSLP4.3 U2.91 | length 15.4
  Top Layer w0.2: FSLP4.3 18.407,50.8 19.875,49.332 19.875,45.897 19.311,45.333 U2.91
TX0: U2.3 U5.5 | length 46.9
  Top Layer w0.2: v1@9.7,40.65 v1@9.7,40.875 ; v1(9.703,40.792) 9.703,40.872 v1@9.7,40.875 ; U2.3 9.849,41.024 v1@9.7,40.875 ; v1(20.251,59.293) U5.5
  Bottom Layer w0.2: v1(9.703,40.792) 9.703,40.872 9.7,40.875 11.284,40.875 12.018,41.609 13.596,41.609 15.25,43.262 15.25,44.396 15.549,44.695 16.977,44.695 18.675,46.394 18.675,47.24 18.265,47.65 17.685,47.65 17.275,47.24 17.275,46.125 16.645,45.495 14.736,45.495 13.211,45.495 12.351,46.355 12.351,51.394 v1(20.251,59.293)
VBUS: C10.1 J1.1 Jumper1.1 | length 59.2
  Top Layer w0.2: J1.1@38.183,57.525 J1.1 C10.1@38.577,62.173 ; v1@47.075,55.5 54.05,55.5 55.6,53.95 55.6,31 50.65,26.05 Jumper1.1
  Bottom Layer w0.2: v1@39.55,62.225 39.224,61.899 39.224,57.025 40.823,55.426 v1@47.051,55.426
  other v1: 47.075,55.45 39.35,61.925
  other v3: 38.1,58.575
VCC#1: C3.1 C4.1 C5.1 C6.1 C7.1 L1.2 P1.2 R1.2 R2.1 R200.1 R201.2 U2.10 U2.31 U2.61 U2.80 U5.4 U7.24 | length 384.2
  Top Layer w0.2: L1.2 4.425,45.45 4,45.025 4,39.45 5.825,37.625 9.1,37.625 9.675,38.2 C4.1@10.45,38.2 ; C4.1@10.45,38.3 C4.1@10.45,38.2 ; R1.2 13.218,73.089 v1(13.777,72.529) ; U2.10@13.285,37.5 U2.10 11.626,37.524 10.95,38.2 v1(10.75,38.2) C4.1@10.45,38.2 ; v1(13.691,55.093) 15.418,55.093 v1(19.406,51.105) ; v1@15.985,36.111 15.985,36.048 v1@16.083,35.95 ; v1(16.1,35.95) v1@16.083,35.95 ; v1(16.476,38.302) 16.476,36.342 v1@16.083,35.95 ; U2.31 17.311,26.091 15.12,23.9 C6.1 12.225,23.9 11.975,23.65 11.975,14.525 15.05,11.45 15.05,7.3 13.475,5.725 8.625,5.725 7.375,4.475 7.375,0.8 16.775,0.8 17.225,0.35 52.575,0.35 v1@52.65,0.425 ; U2.80@24.761,43.524 U2.80 24.811,45.561 25.025,45.775 25.07,45.73 v1(25.07,45.72) ; U5.4 28.263,59.943 v1(29.076,59.13) 29.076,62.874 27.15,64.8 24.65,64.8 24.4,65.05 24.4,67.825 24.5,67.925 28.46,67.925 28.46,73.299 28.35,73.409 P1.2 ; C5.1 27.2,47.904 28.032,47.071 28.25,47.071 v1(28.473,47.295) ; U2.61 31.274,35.024 C3.1 32.245,35.45 32.873,36.078 32.873,41.208 35.128,43.463 v1(35.128,43.866) ; v1@35.35,43.685 R200.1 ; v1@39.771,1.746 v1(39.675,1.65) 39.675,9.85 41.7,11.875 C7.1 41.116,14.5 39.771,13.155 U7.24 ; v1(44.425,40.25) 44.598,40.423 45.477,40.423 R2.1 v1(45.65,38.517) 45.65,36.179 44.902,35.431 44.675,35.657 v1(44.675,35.725) ; v1(50.4,45.75) 50.475,45.825 R201.2 ; v1@51.775,7 52.7,7 v1(52.7,0.725)
  Bottom Layer w0.2: v1(9.449,45.644) 9.449,48.184 11.125,49.86 11.125,52.807 13.411,55.093 v1(13.691,55.093) ; v1(10.75,38.2) 11.275,38.2 11.975,37.5 14.55,37.5 v1(16.1,35.95) ; v1(13.777,72.529) 16.756,69.55 25.35,69.55 28.35,72.55 P1.2 ; v1@16.351,38.126 16.9,38.675 17.14,38.675 17.725,39.26 17.725,40.34 16.99,41.075 16.665,41.075 16.198,41.542 16.198,42.828 17.152,43.782 21.538,43.782 21.903,44.147 25.102,44.147 25.355,43.894 26.267,43.894 26.555,44.182 40.932,44.182 41.493,43.622 ; v1(19.406,51.105) 21.797,48.713 23.69,48.713 23.72,48.743 v1(27.203,48.743) ; v1(25.07,45.72) 25.07,45.73 25.35,45.45 27.184,45.45 28.473,46.739 v1(28.473,47.295) ; v1(29.076,59.13) 29.889,59.13 34.644,54.375 41.89,54.375 50.451,45.814 50.451,40.955 48.013,38.517 v1(45.65,38.517) ; v1(35.128,43.866) 35.128,43.782 35.288,43.622 41.493,43.622 ; v1(39.675,1.65) 39.675,1.689 39.813,1.827 40.123,1.827 40.593,1.357 40.593,1.142 40.859,0.875 49.641,0.875 51.513,2.747 51.513,32.823 52.125,33.435 52.125,34.015 51.49,34.65 45.682,34.65 44.675,35.657 v1(44.675,35.725) ; v1(44.425,40.25) 44.425,40.69 41.493,43.622
  other v1: 51.775,6.975
VFTDI33: C11.2 R200.2 U5.17 | length 13
  Top Layer w0.2: U5.17 32.725,54.867 31.96,54.867 31.952,54.875 29.3,54.875 29.3,52.7 29.25,52.65 29.55,52.35 31.3,52.35 C11.2 R200.2
VIN: Jumper1.2 R201.1 U5.20 | length 87.7
  Top Layer w0.2: U5.20 34.983,56.692 v1(35.725,55.95) ; Jumper1.2@52.088,24.937 57.475,30.325 57.475,55.55 55.45,57.575 46.175,57.575 45.375,56.775 45.375,53.575 45.925,53.025 49.55,53.025 53.8,48.775 R201.1
  Bottom Layer w0.2: v1@35.975,55.975 36.525,56.525 36.525,62.625 36.675,62.775 45.525,62.775 47.05,61.25 v1(47.05,57.525)
pads on no net: FLSP3.4 FSLP1.4 FSLP2.4 FSLP4.4 U2.1 U2.4 U2.5 U2.6 U2.7 U2.8 U2.9 U2.12 U2.13 U2.14 U2.15 U2.16 U2.17 U2.18 U2.19 U2.23 U2.24 U2.25 U2.26 U2.27 U2.28 U2.29 U2.42 U2.43 U2.44 U2.45 U2.46 U2.47 U2.48 U2.49 U2.50 U2.51 U2.52 U2.63 U2.64 U2.65 U2.66 U2.67 U2.68 U2.69 U2.70 U2.79 U5.2 U5.3 U5.6 U5.8 U5.9 U5.10 U5.11 U5.12 U5.13 U5.14 U5.19 U5.22 U5.23 U5.24 U5.27 U5.28
copper on no net:
  other v1: 48.85,35.525
  other v4: 41.175,51.775 41.175,56.275
  other v5: 41.175,48.325 41.175,59.725

## Polygon pours and split planes (outlines as drawn)
"AV GND" on Top Layer "Bottom Layer-No Net" (solid, remove dead copper, pour order 1000): 0.075,80.075 0.25,79.9 58.85,79.9 59,79.751 59,0.075 0.225,0.075 0.075,0.225
"AV GND" on Bottom Layer "Bottom Layer-No Net" (solid, remove dead copper, pour order 1001): 0.075,79.9 58.825,79.9 59,79.725 59,0.075 0.575,0.075 0.075,-0.425

## Other copper
Top Layer:
  pour cut-out: 37,51.85 40.625,51.85 40.625,63.1 40.55,63.175 36.875,63.175 36.875,51.975
  pour cut-out: 26.598,46.128 28.297,46.128 28.425,46 28.425,43.325 26.2,43.325 25.925,43.05 25.811,43.164 25.811,45.825
  pour cut-out: 34.35,11.55 34.3,11.5 34.3,10.375 32.925,10.375 32.875,10.425 33.271,10.821 33.271,11.675
  pour cut-out: 39.075,40.975 39.125,41.025 41.675,41.025 41.675,39.125 41.7,39.1 41.6,39 39.175,39
  pour cut-out: 28.2,42.25 30.074,42.25 30.175,42.149 29.05,43.4 28.425,43.925 28.275,44.075
  pour cut-out: 13.9,42.55 13.825,42.625 11.275,42.625 11.275,44.564 11.125,44.714 14.55,44.714
  pour cut-out: 23.025,19.025 23.025,16.62 23.198,16.447 23.315,16.563 24.92,16.563 24.92,19.105 24.625,19.4
  pour cut-out: 16.725,19.125 16.7,19.1 16.7,16.475 17.95,16.475 18.325,16.85 18.325,19.275
  pour cut-out: 17.25,16.575 17.25,14.9 17.375,14.775 17.5,14.9 20.1,14.9 20.1,16.775 20.35,17.025
  pour cut-out: 23.85,15.75 25.287,17.187 28.037,17.187 28.037,18.987 28.875,19.825 28.25,20.45 26.65,20.45
  pour cut-out: 41.275,15.125 42.375,15.325 42.475,15.125 42.525,15.175 42.375,13.55 40.025,11.625 39.225,11.625 38.9,11.95 38.975,13.35 39.9,13.35 40.125,14.3 40.887,14.695 40.95,14.9 41.075,15.125
  pour cut-out: 43.125,15.95 42.75,15.575 39.875,15.575 43.175,12.275
  pour cut-out: 38.375,26.125 38.225,25.975 36.175,25.975 36.175,23.775 35.75,23.35 36.375,23.5 37.05,23.3 37.875,23.45 39.375,23.625 39,23.865 39.25,24.115
  pour cut-out: 34.675,40.7 46.75,40.7 46.925,40.525 47.575,41.175 47.575,43.75 36.85,43.754 35.3,42.075 33.975,42.3 34.35,42.3
  pour cut-out: 14.85,47.3 14.85,46.075 14.625,45.85 14,45.85 14,45.95 14.375,46.325 14.425,46.275 14.425,46.075 14.275,46.225 14.275,47.325
  pour cut-out: 26,48.625 26.1,48.525 26.5,48.525 26.5,46.913 26.567,46.846 26.271,46.55 26.15,46.55
  pour cut-out: 40.075,51.25 38.575,51.05 37.025,51.25 36.5,51.775 36.5,52.65 40.15,52.65 40.425,52.375
  pour cut-out: 14.85,78.925 18.408,78.925 19.325,78.008 19.325,75.875 18.525,75.075 14.6,75.075
  pour cut-out: 31.875,38.175 31.875,38.15 30.325,36.6 29.4,36.6 29.4,40.475 29.418,40.457 32.075,40.457
  pour cut-out: 25.2,49.575 26.15,49.575 26.25,49.675 26.25,48.625
  pour cut-out: 8.7,48.275 8.7,47.241 9.616,46.325 10.516,47.225 11.975,47.225 11.975,48.1 11.275,48.8
  pour cut-out: 8.825,53.6 12.325,53.6 14.15,51.775 13.525,51.15 9.075,51.15
  pour cut-out: 11.65,77.15 11.875,77.2 14.45,76.975 14.675,73.85 14.95,73.575 14.425,73.05 11.875,73.05
  pour cut-out: 22.3,58.25 22.3,53.375 23.375,52.3 35.925,52.3 35.925,62.55 35.025,63.45 29,63.45 23.927,62.586
  pour cut-out: 21.225,77.25 21.225,78.25 21.9,78.925 30.725,78.925 30.725,73.075 31.175,72.625 30.625,72.075 28.549,72.075 27.899,71.425 27.074,72.25 24.25,72.25 24.25,73.18 22.63,74.8 21.55,74.8
  pour cut-out: 7.936,1.361 50.711,1.361 51.4,2.05 49.975,3.475 49.975,7.625 17.65,7.625 17.075,8.2 14.1,5.225 7.75,5.225 7.75,1.547 7.936,1.361 8.175,1.6 8.175,2.5
  pour cut-out: 14.199,43.057 10.918,43.057 10.9,43.075 10.9,29.275 14.3,29.275 14.425,29.15
  pour cut-out: 27.275,45.175 27.4,45.325 13.7,45.375 13.7,42.5 14.676,41.524 29.05,41.524
  pour cut-out: 45.35,69.825 50.55,69.825 50.625,69.9 50.625,76.2 45.35,76.2 45.025,75.875
  pour cut-out: 39.75,76.025 39.925,76.2 44.825,76.2 44.825,73.175 44.925,73.075 44.725,72.875 39.775,72.875
  pour cut-out: 45.703,34.556 52.519,34.556 52.375,34.7 52.375,38.575 48.4,38.15 48.05,36.725
  pour cut-out: 49.7,29.175 49.75,29.175 47.45,29.2 45.5,29.2 45.45,33.1 45.875,33.525 46.325,33.075 49.7,33.2
  pour cut-out: 55.4,19.55 55.4,16.5 52.525,16.5 52.725,17.075 52.35,17.225 52.35,19.55
  pour cut-out: 16.85,24.35 17.05,22.575 16.55,21.1 16.125,20.675 16.35,20.625 16.35,19.775 17.125,18.65 28.125,18.75 28.125,25.475 28.557,25.907
  pour cut-out: 40.15,18.675 40.2,18.725 40.975,18.725 40.975,20.625 40.6,20.25 33.05,20.25 33.05,19.579 32.621,19.15
  pour cut-out: 14.5,74.1 18.3,74.1 18.45,73.95 18.45,75.45 14.5,75.45 14.475,75.425
  pour cut-out: 47.15,19.95 47.125,19.975 47.125,23.25 49.3,23.25 49.325,23.225 49.775,23.675 49.775,25.85 50,26.075 55.225,26.075 55.225,23.425 55.275,23.375 55.3,23.4 58.975,23.4 58.975,20.825 58.868,20.718 52.778,20.718 52.75,20.747 52.75,18.725 52.125,18.725 51.925,18.525
  text "B. Kazemi" at 33.825,77.825 h1.6
  text "Rev.10" at 49.2,77.675 h1.6
Bottom Layer:
  pour cut-out: 36.425,50.225 39.85,50.225 39.85,57.85 39.825,57.875 39.775,57.825 35.575,57.825 35.575,50.625 35.95,50.25
  pour cut-out: 51.978,18.953 54.528,18.953 54.653,19.078 54.878,18.853 54.878,16.078 51.853,16.078 51.703,15.928
  pour cut-out: 23.45,74.875 21.3,74.875 21.334,74.909 21.334,77.989
  pour cut-out: 38.1,62.25 38.15,62.3 44.35,62.3 44.35,56.151 43.225,55.026 39.4,55.026 37.743,56.683 37.743,58.4
  pour cut-out: 20.9,78.85 20.95,78.8 30.4,78.8 30.4,72.886 30.625,72.661 30.439,72.475 24.1,72.475 24.1,74.158 22.414,75.844

## Silkscreen, mask and mechanical layers (free items; w line width, h text height)
Top Overlay:
  circle w0.254: c39.475,17.175 r0.388
  text "B. Kazemi" at 42.825,11.95 h1.52
  text "Haptic Feed" at 42.825,9.97 h1.52
  text "Rev. 10" at 42.8,7.9 h1.52
Top Paste:
  pour cut-out: 58.7,14.9 58.575,14.775 55.65,14.775 55.65,16.075 55.725,16 58.75,16
  pour cut-out: 30.25,63.275 32.475,63.275 31.625,64.125 30.125,64.125
  pour cut-out: 31.3,64.05 31.3,66.175 31.2,66.275 30.225,66.275 30.225,64.6 30,64.375 30.125,64.25 30.125,64.125
Mechanical 1:
  lines w0.254: 0,0 58.95,0 58.95,80 0.05,80 0.05,0.05

## Text inside footprints (layer, text, board x,y; h text height)
BT1: Top Overlay "+" at 52.375,17.365 h0.5
P1: Top Overlay "6" at 20.85,73.525 h1.27; Top Overlay "5" at 20.775,76.2 h1.27; Top Overlay "1" at 29.975,76.2 h1.27; Top Overlay "2" at 29.675,73.675 h1.27